# Altium PCB iso_simucam.PcbDoc (part 2 of 4)
Units mil, origin at the board's own origin, x right, y up, seen from the top; angles counter-clockwise.
Board outline 2600 x 5120 mil, 2 copper layers (Top Layer, Bottom Layer); 384 components, 206 nets, 1336 pads, 508 vias.
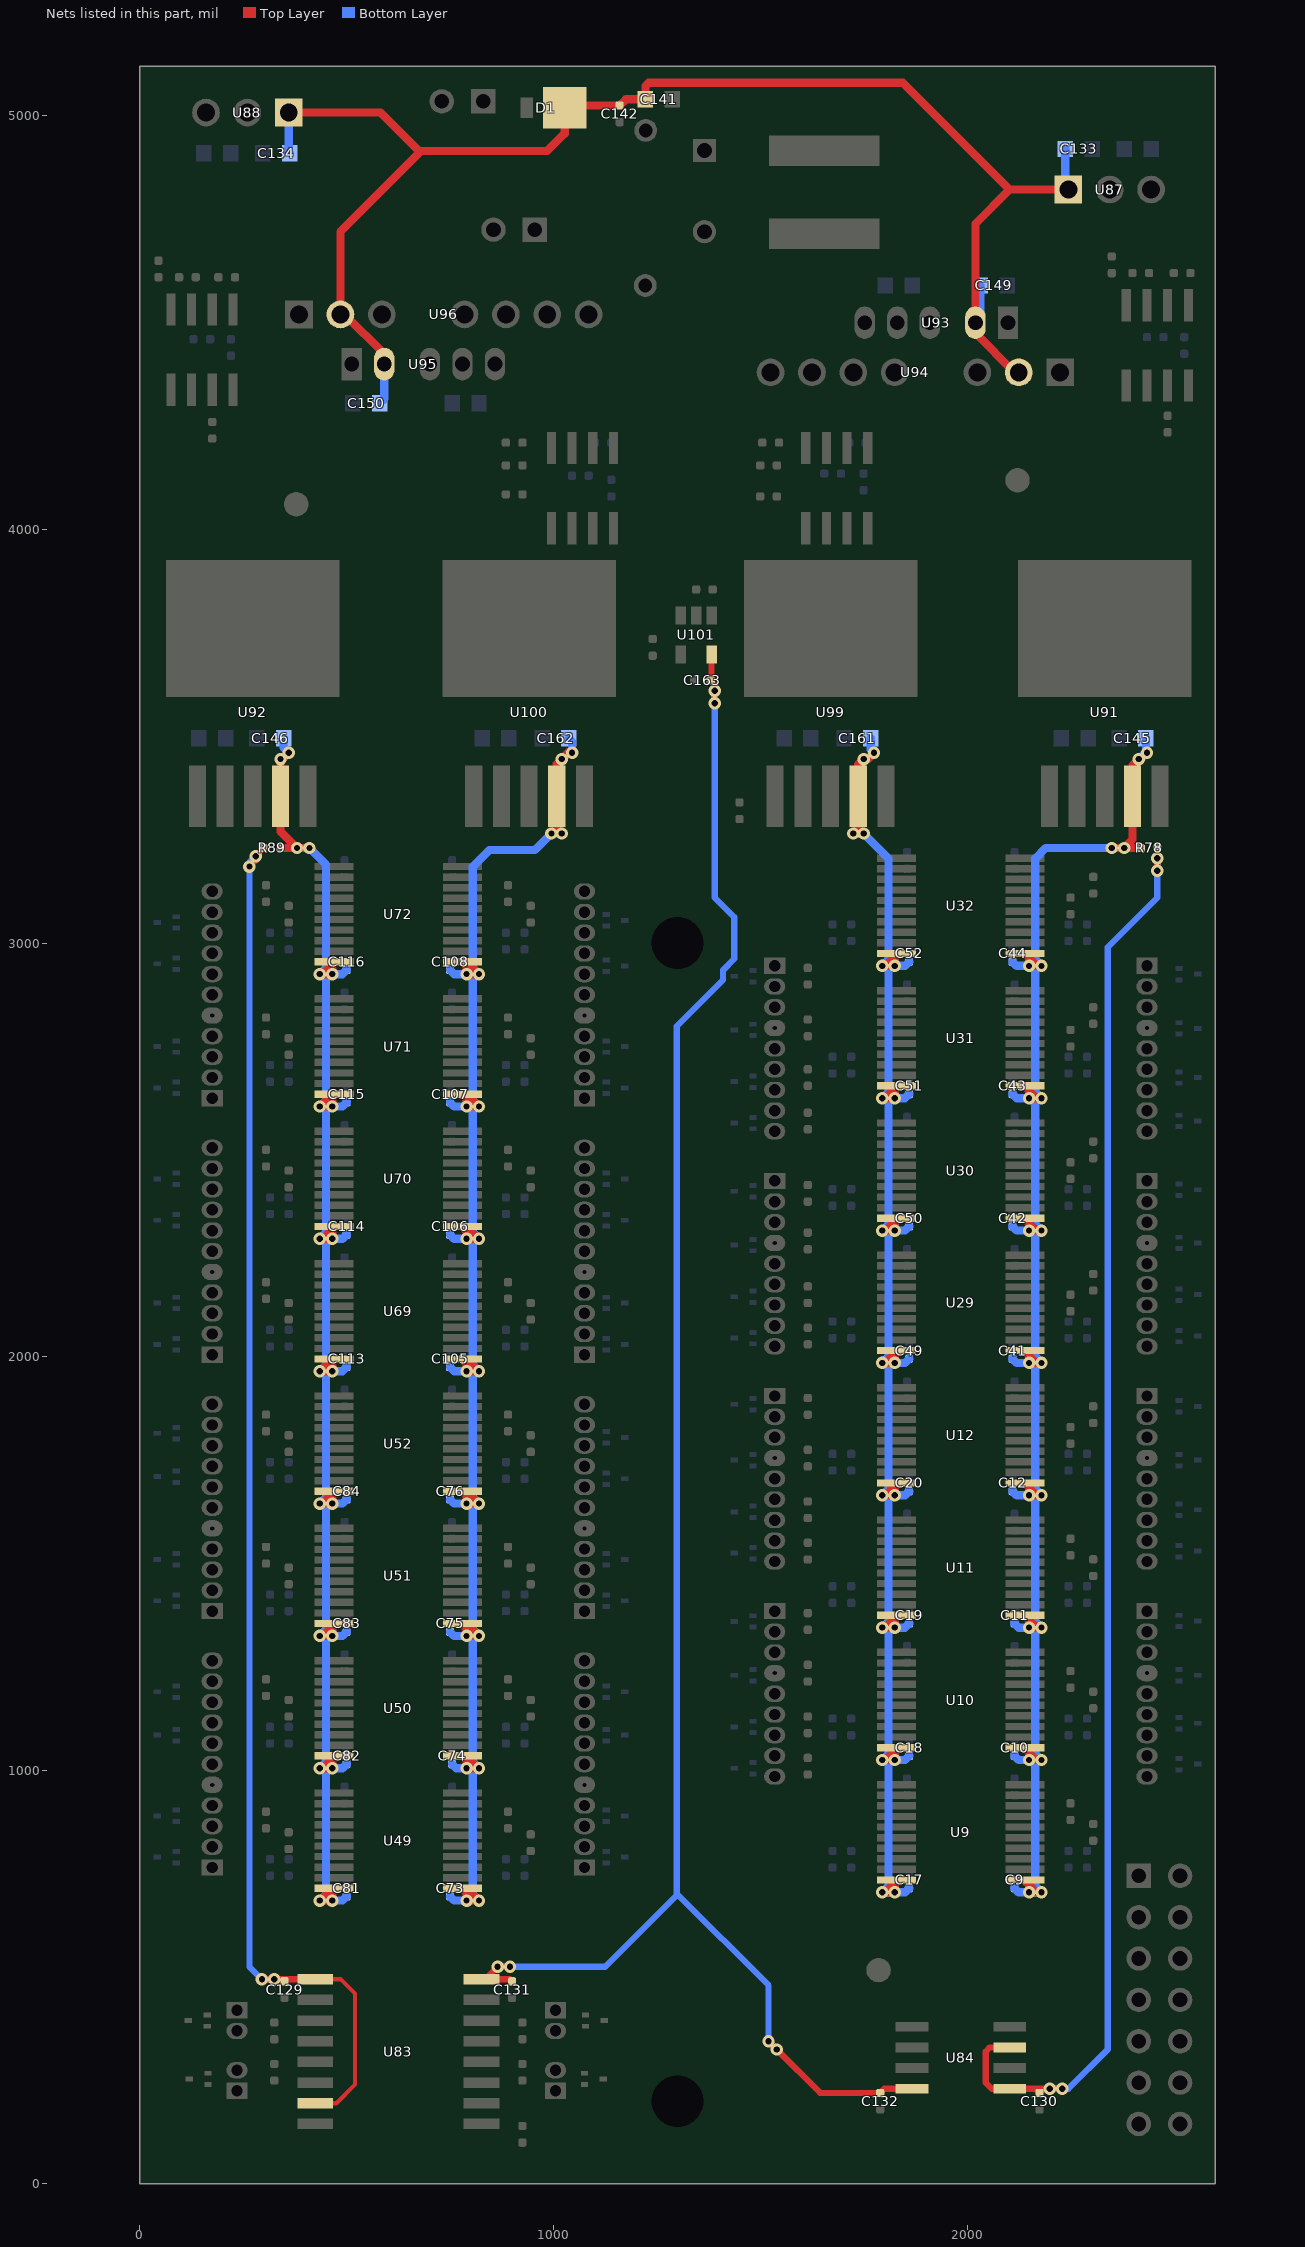
[diagram p2: the nets of this part, all layers, seen from the top]

## Components (designator, comment, footprint, x,y, rotation, side; value= is the part's Value field where it differs from the comment) (continued)
C38 "Capacitor Cerâmico SMD" 0402-cap 2245,2385 r180 bottom
C39 "Capacitor Cerâmico SMD" 0402-cap 2245,2705 r180 bottom
C40 "Capacitor Cerâmico SMD" 0402-cap 2245,3025 r180 bottom
C41 "Capacitor Cerâmico SMD" 0402-cap 2110,2015 r0 bottom
C42 "Capacitor Cerâmico SMD" 0402-cap 2110,2335 r0 bottom
C43 "Capacitor Cerâmico SMD" 0402-cap 2110,2655 r0 bottom
C44 "Capacitor Cerâmico SMD" 0402-cap 2110,2975 r0 bottom
C45 "Capacitor Cerâmico SMD" 0402-cap 2115,2240 r180 bottom
C46 "Capacitor Cerâmico SMD" 0402-cap 2115,2560 r180 bottom
C47 "Capacitor Cerâmico SMD" 0402-cap 2115,2880 r180 bottom
C48 "Capacitor Cerâmico SMD" 0402-cap 2115,3200 r180 bottom
C49 "Capacitor Cerâmico SMD" 0402-cap 1860,2015 r180 bottom
C50 "Capacitor Cerâmico SMD" 0402-cap 1860,2335 r180 bottom
C51 "Capacitor Cerâmico SMD" 0402-cap 1860,2655 r180 bottom
C52 "Capacitor Cerâmico SMD" 0402-cap 1860,2975 r180 bottom
C53 "Capacitor Cerâmico SMD" 0402-cap 1855,2240.08 r180 bottom
C54 "Capacitor Cerâmico SMD" 0402-cap 1855,2560 r180 bottom
C55 "Capacitor Cerâmico SMD" 0402-cap 1855,2880 r180 bottom
C56 "Capacitor Cerâmico SMD" 0402-cap 1855,3200 r180 bottom
C57 "Capacitor Cerâmico SMD" 0402-cap 1720,2065 r180 bottom
C58 "Capacitor Cerâmico SMD" 0402-cap 1720,2385.08 r180 bottom
C59 "Capacitor Cerâmico SMD" 0402-cap 1720,2705 r180 bottom
C60 "Capacitor Cerâmico SMD" 0402-cap 1720,3025 r180 bottom
C61 "Capacitor Cerâmico SMD" 0402-cap 1675,2065 r180 bottom
C62 "Capacitor Cerâmico SMD" 0402-cap 1675,2385.08 r180 bottom
C63 "Capacitor Cerâmico SMD" 0402-cap 1675,2705 r180 bottom
C64 "Capacitor Cerâmico SMD" 0402-cap 1675,3025 r180 bottom
C65 "Capacitor Cerâmico SMD" 0402-cap 930,765 r180 bottom
C66 "Capacitor Cerâmico SMD" 0402-cap 930,1085 r180 bottom
C67 "Capacitor Cerâmico SMD" 0402-cap 930,1405.08 r180 bottom
C68 "Capacitor Cerâmico SMD" 0402-cap 930,1725 r180 bottom
C69 "Capacitor Cerâmico SMD" 0402-cap 885,765 r180 bottom
C70 "Capacitor Cerâmico SMD" 0402-cap 885,1085 r180 bottom
C71 "Capacitor Cerâmico SMD" 0402-cap 885,1405.08 r180 bottom
C72 "Capacitor Cerâmico SMD" 0402-cap 885,1725 r180 bottom
C73 "Capacitor Cerâmico SMD" 0402-cap 750,715.08 r0 bottom
C74 "Capacitor Cerâmico SMD" 0402-cap 755,1035.08 r0 bottom
C75 "Capacitor Cerâmico SMD" 0402-cap 750,1355 r0 bottom
C76 "Capacitor Cerâmico SMD" 0402-cap 750,1675 r0 bottom
C77 "Capacitor Cerâmico SMD" 0402-cap 755,940 r180 bottom
C78 "Capacitor Cerâmico SMD" 0402-cap 755,1260.08 r180 bottom
C79 "Capacitor Cerâmico SMD" 0402-cap 755,1580 r180 bottom
C80 "Capacitor Cerâmico SMD" 0402-cap 755,1900 r180 bottom
C81 "Capacitor Cerâmico SMD" 0402-cap 500,715 r180 bottom
C82 "Capacitor Cerâmico SMD" 0402-cap 500,1035 r180 bottom
C83 "Capacitor Cerâmico SMD" 0402-cap 500,1355 r180 bottom
C84 "Capacitor Cerâmico SMD" 0402-cap 500,1675.08 r180 bottom
C85 "Capacitor Cerâmico SMD" 0402-cap 495,940 r180 bottom
C86 "Capacitor Cerâmico SMD" 0402-cap 495,1260 r180 bottom
C87 "Capacitor Cerâmico SMD" 0402-cap 495,1580.08 r180 bottom
C88 "Capacitor Cerâmico SMD" 0402-cap 495,1900.08 r180 bottom
C89 "Capacitor Cerâmico SMD" 0402-cap 360,765 r180 bottom
C90 "Capacitor Cerâmico SMD" 0402-cap 360,1085 r180 bottom
C91 "Capacitor Cerâmico SMD" 0402-cap 360,1405 r180 bottom
C92 "Capacitor Cerâmico SMD" 0402-cap 360,1725 r180 bottom
C93 "Capacitor Cerâmico SMD" 0402-cap 315,765.08 r180 bottom
C94 "Capacitor Cerâmico SMD" 0402-cap 315,1085 r180 bottom
C95 "Capacitor Cerâmico SMD" 0402-cap 315,1405 r180 bottom
C96 "Capacitor Cerâmico SMD" 0402-cap 315,1725.08 r180 bottom
C97 "Capacitor Cerâmico SMD" 0402-cap 930,2045 r180 bottom
C98 "Capacitor Cerâmico SMD" 0402-cap 930,2365.08 r180 bottom
C99 "Capacitor Cerâmico SMD" 0402-cap 930,2685 r180 bottom
C100 "Capacitor Cerâmico SMD" 0402-cap 930,3005 r180 bottom
C101 "Capacitor Cerâmico SMD" 0402-cap 885,2045 r180 bottom
C102 "Capacitor Cerâmico SMD" 0402-cap 885,2365 r180 bottom
C103 "Capacitor Cerâmico SMD" 0402-cap 885,2685 r180 bottom
C104 "Capacitor Cerâmico SMD" 0402-cap 885,3005 r180 bottom
C105 "Capacitor Cerâmico SMD" 0402-cap 750,1995 r0 bottom
C106 "Capacitor Cerâmico SMD" 0402-cap 750,2315 r0 bottom
C107 "Capacitor Cerâmico SMD" 0402-cap 750,2635.08 r0 bottom
C108 "Capacitor Cerâmico SMD" 0402-cap 750,2955 r0 bottom
C109 "Capacitor Cerâmico SMD" 0402-cap 755,2220 r180 bottom
C110 "Capacitor Cerâmico SMD" 0402-cap 755,2540 r180 bottom
C111 "Capacitor Cerâmico SMD" 0402-cap 755,2860.08 r180 bottom
C112 "Capacitor Cerâmico SMD" 0402-cap 755,3180 r180 bottom
C113 "Capacitor Cerâmico SMD" 0402-cap 500,1995 r180 bottom
C114 "Capacitor Cerâmico SMD" 0402-cap 500,2315 r180 bottom
C115 "Capacitor Cerâmico SMD" 0402-cap 500,2635.08 r180 bottom
C116 "Capacitor Cerâmico SMD" 0402-cap 500,2955 r180 bottom
C117 "Capacitor Cerâmico SMD" 0402-cap 495,2220 r180 bottom
C118 "Capacitor Cerâmico SMD" 0402-cap 495,2540.08 r180 bottom
C119 "Capacitor Cerâmico SMD" 0402-cap 495,2859.92 r180 bottom
C120 "Capacitor Cerâmico SMD" 0402-cap 495,3180 r180 bottom
C121 "Capacitor Cerâmico SMD" 0402-cap 360,2045 r180 bottom
C122 "Capacitor Cerâmico SMD" 0402-cap 360,2365 r180 bottom
C123 "Capacitor Cerâmico SMD" 0402-cap 360,2685 r180 bottom
C124 "Capacitor Cerâmico SMD" 0402-cap 360,3005 r180 bottom
C125 "Capacitor Cerâmico SMD" 0402-cap 315,2045 r180 bottom
C126 "Capacitor Cerâmico SMD" 0402-cap 315,2365.08 r180 bottom
C127 "Capacitor Cerâmico SMD" 0402-cap 315,2685 r180 bottom
C128 "Capacitor Cerâmico SMD" 0402-cap 315,3005 r180 bottom
C129 "Capacitor Cerâmico SMD" 0402-cap 350,470 r180 top
C130 "Capacitor Cerâmico SMD" 0402-cap 2175,200 r0 top
C131 "Capacitor Cerâmico SMD" 0402-cap 900,469.92 r0 top
C132 "Capacitor Cerâmico SMD" 0402-cap 1790,200 r180 top
C133 "Capacitor Cerâmico SMD" "0603 - CAP - montagem na maquina" 2270,4920 r180 bottom
C134 "Capacitor Cerâmico SMD" "0603 - CAP - montagem na maquina" 330,4910 r0 bottom
C135 "Capacitor Cerâmico SMD" "0603 - CAP - montagem na maquina" 2412.48,4920 r0 bottom
C136 "Capacitor Cerâmico SMD" "0603 - CAP - montagem na maquina" 187.48,4910 r180 bottom
C137 "Capacitor Cerâmico SMD" 0402-cap 2520,4620 r270 top
C138 "Capacitor Cerâmico SMD" 0402-cap 210,4610 r270 top
C139 "Capacitor Cerâmico SMD" 0402-cap 2350,4640 r0 top
C140 "Capacitor Cerâmico SMD" 0402-cap 45,4630 r0 top
C141 "Capacitor Cerâmico SMD" "0603 - CAP - montagem na maquina" 1255,5040 r180 top
C142 "Capacitor Cerâmico SMD" 0402-cap 1160,5005 r180 top
C143 "Capacitor Cerâmico SMD" "0603 - CAP - montagem na maquina" 2260,3495 r180 bottom
C144 "Capacitor Cerâmico SMD" "0603 - CAP - montagem na maquina" 175,3495 r180 bottom
C145 "Capacitor Cerâmico SMD" "0603 - CAP - montagem na maquina" 2400,3495 r0 bottom
C146 "Capacitor Cerâmico SMD" "0603 - CAP - montagem na maquina" 315,3495 r0 bottom
C147 "DEBF33D103ZA3B" CAP_10X4 1365,4720 r270 top value=Value
C148 "Capacitor Cerâmico SMD" C2225 1655,4815.39 r270 top
C149 "Capacitor Cerâmico SMD" "0603 - CAP - montagem na maquina" 2065,4590 r180 bottom
C150 "Capacitor Cerâmico SMD" "0603 - CAP - montagem na maquina" 547.52,4305 r0 bottom
C151 "Capacitor Cerâmico SMD" "0603 - CAP - montagem na maquina" 1835,4590 r0 bottom
C152 "Capacitor Cerâmico SMD" "0603 - CAP - montagem na maquina" 787.52,4305 r180 bottom
C153 "Capacitor Cerâmico SMD" 0402-cap 1735,4210 r90 bottom
C154 "Capacitor Cerâmico SMD" 0402-cap 1120,4210 r90 bottom
C155 "Capacitor Cerâmico SMD" 0402-cap 1525.08,4210 r90 top
C156 "Capacitor Cerâmico SMD" 0402-cap 905,4210 r90 top
C157 "Capacitor Cerâmico SMD" "0603 - CAP - montagem na maquina" 1590,3495 r180 bottom
C158 "Capacitor Cerâmico SMD" "0603 - CAP - montagem na maquina" 860,3495 r180 bottom
C159 "Capacitor Cerâmico SMD" 0402-cap 1365,3855 r90 top
C160 "Capacitor Cerâmico SMD" 0402-cap 1240,3715 r0 top
C161 "Capacitor Cerâmico SMD" "0603 - CAP - montagem na maquina" 1735,3495 r0 bottom
C162 "Capacitor Cerâmico SMD" "0603 - CAP - montagem na maquina" 1005,3495 r0 bottom
C163 "Capacitor Cerâmico SMD" 0402-cap 1360.08,3635 r90 top
CN1 "MHDR1X9" MHDR1X9_Axonn 2435,1385 r270 bottom locked
CN2 "MHDR1X9" MHDR1X9_Axonn 2435,1905 r270 bottom locked
CN3 "MHDR1X9" MHDR1X9_Axonn 1535,1385 r270 top locked
CN4 "MHDR1X9" MHDR1X9_Axonn 1535,1905 r270 top locked
CN5 "MHDR1X9" MHDR1X9_Axonn 2435,2425 r270 bottom locked
CN6 "MHDR1X9" MHDR1X9_Axonn 2435,2945 r270 bottom locked
CN7 "MHDR1X9" MHDR1X9_Axonn 1535,2425 r270 top locked
CN8 "MHDR1X9" MHDR1X9_Axonn 1535,2945 r270 top locked
CN9 "MHDR1X11" MHDR1X11_Axonn 1075,765 r90 top locked
CN10 "MHDR1X11" MHDR1X11_Axonn 1075,1385 r90 top locked
CN11 "MHDR1X11" MHDR1X11_Axonn 175,765 r90 bottom locked
CN12 "MHDR1X11" MHDR1X11_Axonn 175,1385 r90 bottom locked
CN13 "MHDR1X11" MHDR1X11_Axonn 1075,2005 r90 top locked
CN14 "MHDR1X11" MHDR1X11_Axonn 1075,2625 r90 top locked
CN15 "MHDR1X11" MHDR1X11_Axonn 175,2005 r90 bottom locked
CN16 "MHDR1X11" MHDR1X11_Axonn 175,2625 r90 bottom locked
CN17 "MHDR1X2" MHDR1X2_AXONN 235,420 r270 top
CN18 "MHDR1X2" MHDR1X2_AXONN 235,225 r90 top
CN19 "Header 7X2" HDR2X7 2415,745 r270 top
CN20 "MHDR1X2" MHDR1X2_AXONN 1005,420 r270 top
CN21 "MHDR1X2" MHDR1X2_AXONN 1005,225 r90 top
CN22 "Header 2" HDR1X2 830,5035 r180 top
CN23 "Header 2" HDR1X2 955,4725 r180 top
D1 "NRVBM130LT3G" D0-216AA 1027.12,5020 r90 top
ESD "##nl" ESTATICA 1466,557 r0 top
ESD1 "##nl" ESTATICA 615,335 r180 bottom
fab1 "Comment" "TEXTO FABRICACAO" 1375,7920 r0 top
FD1 "##nl" FIDUCIAL 378,4061 r0 top
FD2 "##nl" FIDUCIAL 2122,4119 r0 top
FD3 "##nl" FIDUCIAL 1786,517 r0 top
R1 "Res3" 0402-res 2305,850 r0 top
R2 "Res3" 0402-res 2250,900 r0 top
R3 "Res3" 0402-res 2305,1170 r0 top
R4 "Res3" 0402-res 2250,1220 r0 top
R5 "Res3" 0402-res 2305,1490 r0 top
R6 "Res3" 0402-res 2250,1540 r0 top
R7 "Res3" 0402-res 2250,1810 r0 top
R8 "Res3" 0402-res 2305,1860 r0 top
R9 "Res3" 0402-res 1615,1010 r0 top
R10 "Res3" 0402-res 1615,1110 r0 top
R11 "Res3" 0402-res 1615,1235 r0 top
R12 "Res3" 0402-res 1615,1360 r0 top
R13 "Res3" 0402-res 1615,1530 r0 top
R14 "Res3" 0402-res 1615,1630 r0 top
R15 "Res3" 0402-res 1615,1755 r0 top
R16 "Res3" 0402-res 1615,1880 r0 top
R17 "Res3" 0402-res 2250,2130 r0 top
R18 "Res3" 0402-res 2305,2180 r0 top
R19 "Res3" 0402-res 2250,2450 r0 top
R20 "Res3" 0402-res 2305,2500 r0 top
R21 "Res3" 0402-res 2250,2770 r0 top
R22 "Res3" 0402-res 2305,2825 r0 top
R23 "Res3" 0402-res 2250,3090 r0 top
R24 "Res3" 0402-res 2305,3140 r0 top
R25 "Res3" 0402-res 1615,2050 r0 top
R26 "Res3" 0402-res 1615,2150 r0 top
R27 "Res3" 0402-res 1615,2280 r0 top
R28 "Res3" 0402-res 1615,2395 r0 top
R29 "Res3" 0402-res 1615,2570 r0 top
R30 "Res3" 0402-res 1615,2675 r0 top
R31 "Res3" 0402-res 1615,2795 r0 top
R32 "Res3" 0402-res 1615,2920.08 r0 top
R33 "Res3" 0402-res 945,825 r0 top
R34 "Res3" 0402-res 890,880 r0 top
R35 "Res3" 0402-res 945,1150.08 r0 top
R36 "Res3" 0402-res 890,1200 r0 top
R37 "Res3" 0402-res 945,1470 r0 top
R38 "Res3" 0402-res 890,1520 r0 top
R39 "Res3" 0402-res 945,1790 r0 top
R40 "Res3" 0402-res 890,1840 r0 top
R41 "Res3" 0402-res 360,830 r0 top
R42 "Res3" 0402-res 305,880 r0 top
R43 "Res3" 0402-res 360,1150 r0 top
R44 "Res3" 0402-res 305,1200 r0 top
R45 "Res3" 0402-res 360,1470 r0 top
R46 "Res3" 0402-res 305,1520 r0 top
R47 "Res3" 0402-res 360,1790 r0 top
R48 "Res3" 0402-res 305,1840 r0 top
R49 "Res3" 0402-res 945,2110 r0 top
R50 "Res3" 0402-res 890,2160 r0 top
R51 "Res3" 0402-res 945,2430 r0 top
R52 "Res3" 0402-res 890,2480 r0 top
R53 "Res3" 0402-res 945,2750 r0 top
R54 "Res3" 0402-res 890,2800 r0 top
R55 "Res3" 0402-res 945,3070 r0 top
R56 "Res3" 0402-res 890,3120 r0 top
R57 "Res3" 0402-res 360,2110 r0 top
R58 "Res3" 0402-res 305,2160 r0 top
R59 "Res3" 0402-res 360,2430 r0 top
R60 "Res3" 0402-res 305,2480 r0 top
R61 "Res3" 0402-res 360,2750 r0 top
R62 "Res3" 0402-res 305,2800 r0 top
R63 "Res3" 0402-res 360,3070 r0 top
R64 "Res3" 0402-res 305,3120 r0 top
R65 "Res3" 0402-res 325,370 r180 top
R66 "Res3" 0402-res 325,270.08 r180 top
R67 "Res3" 0402-res 925,120 r180 top
R68 "Res3" 0402-res 925,370.08 r180 top
R69 "Res3" 0402-res 925,270 r180 top
R70 "Res3" 0402-res 2420,4620 r270 top
R71 "Res3" 0402-res 115,4610 r270 top
R72 "Res3" 0402-res 2455,4465 r90 bottom
R73 "Res3" 0402-res 149.92,4460 r90 bottom
R74 "Res3" 0402-res 2525,4445 r180 bottom
R75 "Res3" 0402-res 220,4440.08 r180 bottom
R76 "Res3" 0402-res 2485,4255 r180 top
R77 "Res3" 0402-res 175,4240 r180 top
R78 "Res3" 0402-res 2440.08,3230 r90 top
R79 "Res3" CR25 1225,4740 r0 top
R80 "Res3" 0402-res 1520.08,4155 r270 top
R81 "Res3" 0402-res 905,4155 r270 top
R82 "Res3" 0402-res 1675,4135 r90 bottom
R83 "Res3" 0402-res 1065,4130 r90 bottom
R84 "Res3" 0402-res 1750,4115 r180 bottom
R85 "Res3" 0402-res 1140,4100 r180 bottom
R86 "Res3" 0402-res 1520,4080 r90 top
R87 "Res3" 0402-res 905,4085 r90 top
R88 "Res3" 0402-res 1450,3320 r180 top
R89 "Res3" 0402-res 320,3230 r270 top
U1 "TPD2E009DRTR" DRT3 2535,1015 r90 bottom
U2 "TPD2E009DRTR" DRT3 2535,1113.78 r90 bottom
U3 "TPD2E009DRTR" DRT3 2535,1230 r90 bottom
U4 "TPD2E009DRTR" DRT3 2535,1361.22 r90 bottom
U5 "TPD2E009DRTR" DRT3 2535,1530 r90 bottom
U6 "TPD2E009DRTR" DRT3 2535,1630 r90 bottom
U7 "TPD2E009DRTR" DRT3 2535,1750 r90 bottom
U8 "TPD2E009DRTR" DRT3 2535,1880 r90 bottom
U9 "ADN4650BRSZ" SSOP-RS-20 1985,850 r180 top locked
U10 "ADN4650BRSZ" SSOP-RS-20 1985,1170 r180 top locked
U11 "ADN4650BRSZ" SSOP-RS-20 1985,1490 r180 top locked
U12 "ADN4650BRSZ" SSOP-RS-20 1985,1810 r180 top locked
U13 "TPD2E009DRTR" DRT3 1460,1005 r270 bottom
U14 "TPD2E009DRTR" DRT3 1460,1105 r270 bottom
U15 "TPD2E009DRTR" DRT3 1460,1230 r270 bottom
U16 "TPD2E009DRTR" DRT3 1460,1360 r270 bottom
U17 "TPD2E009DRTR" DRT3 1460,1525 r270 bottom
U18 "TPD2E009DRTR" DRT3 1460,1625 r270 bottom
U19 "TPD2E009DRTR" DRT3 1460,1750 r270 bottom
U20 "TPD2E009DRTR" DRT3 1460,1885 r270 bottom
U21 "TPD2E009DRTR" DRT3 2535,2050 r90 bottom
U22 "TPD2E009DRTR" DRT3 2535,2150 r90 bottom
U23 "TPD2E009DRTR" DRT3 2535,2275 r90 bottom
U24 "TPD2E009DRTR" DRT3 2535,2403.78 r90 bottom
U25 "TPD2E009DRTR" DRT3 2535,2570 r90 bottom
U26 "TPD2E009DRTR" DRT3 2535,2675 r90 bottom
U27 "TPD2E009DRTR" DRT3 2535,2793.78 r90 bottom
U28 "TPD2E009DRTR" DRT3 2535,2925 r90 bottom
U29 "ADN4650BRSZ" SSOP-RS-20 1985,2130 r180 top locked
U30 "ADN4650BRSZ" SSOP-RS-20 1985,2450 r180 top locked
U31 "ADN4650BRSZ" SSOP-RS-20 1985,2770 r180 top locked
U32 "ADN4650BRSZ" SSOP-RS-20 1985,3090.16 r180 top locked
U33 "TPD2E009DRTR" DRT3 1460,2045 r270 bottom
U34 "TPD2E009DRTR" DRT3 1460,2145 r270 bottom
U35 "TPD2E009DRTR" DRT3 1460,2270 r270 bottom
U36 "TPD2E009DRTR" DRT3 1460,2400 r270 bottom
U37 "TPD2E009DRTR" DRT3 1460,2565 r270 bottom
U38 "TPD2E009DRTR" DRT3 1460,2665 r270 bottom
U39 "TPD2E009DRTR" DRT3 1460,2790 r270 bottom
U40 "TPD2E009DRTR" DRT3 1460,2920 r270 bottom
U41 "TPD2E009DRTR" DRT3 1150,790 r90 bottom
U42 "TPD2E009DRTR" DRT3 1150,890 r90 bottom
U43 "TPD2E009DRTR" DRT3 1150,1085 r90 bottom
U44 "TPD2E009DRTR" DRT3 1150,1190 r90 bottom
U45 "TPD2E009DRTR" DRT3 1150,1410 r90 bottom
U46 "TPD2E009DRTR" DRT3 1150,1510 r90 bottom
U47 "TPD2E009DRTR" DRT3 1150,1705 r90 bottom
U48 "TPD2E009DRTR" DRT3 1150,1805 r90 bottom
U49 "ADN4650BRSZ" SSOP-RS-20 625,830 r180 top locked
U50 "ADN4650BRSZ" SSOP-RS-20 625,1150 r180 top locked
U51 "ADN4650BRSZ" SSOP-RS-20 625,1470 r180 top locked
U52 "ADN4650BRSZ" SSOP-RS-20 625,1790 r180 top locked
U53 "TPD2E009DRTR" DRT3 65,790 r270 bottom
U54 "TPD2E009DRTR" DRT3 65,890 r270 bottom
U55 "TPD2E009DRTR" DRT3 65,1085 r270 bottom
U56 "TPD2E009DRTR" DRT3 65,1190 r270 bottom
U57 "TPD2E009DRTR" DRT3 65,1410 r270 bottom
U58 "TPD2E009DRTR" DRT3 65,1510 r270 bottom
U59 "TPD2E009DRTR" DRT3 65,1710 r270 bottom
U60 "TPD2E009DRTR" DRT3 65,1815 r270 bottom
U61 "TPD2E009DRTR" DRT3 1150,2030 r90 bottom
U62 "TPD2E009DRTR" DRT3 1150,2130 r90 bottom
U63 "TPD2E009DRTR" DRT3 1150,2330 r90 bottom
U64 "TPD2E009DRTR" DRT3 1150,2430 r90 bottom
U65 "TPD2E009DRTR" DRT3 1150,2650 r90 bottom
U66 "TPD2E009DRTR" DRT3 1150,2750 r90 bottom
U67 "TPD2E009DRTR" DRT3 1150,2945 r90 bottom
U68 "TPD2E009DRTR" DRT3 1150,3055 r90 bottom
U69 "ADN4650BRSZ" SSOP-RS-20 625,2109.57 r180 top locked
U70 "ADN4650BRSZ" SSOP-RS-20 625,2430 r180 top locked
U71 "ADN4650BRSZ" SSOP-RS-20 625,2750 r180 top locked
U72 "ADN4650BRSZ" SSOP-RS-20 625,3070 r180 top locked
U73 "TPD2E009DRTR" DRT3 65,2030 r270 bottom
U74 "TPD2E009DRTR" DRT3 65,2130 r270 bottom
U75 "TPD2E009DRTR" DRT3 65,2330 r270 bottom
U76 "TPD2E009DRTR" DRT3 65,2430 r270 bottom
U77 "TPD2E009DRTR" DRT3 65,2650 r270 bottom
U78 "TPD2E009DRTR" DRT3 65,2750 r270 bottom
U79 "TPD2E009DRTR" DRT3 65,2950 r270 bottom
U80 "TPD2E009DRTR" DRT3 65,3050 r270 bottom
U81 "TPD2E009DRTR" DRT3 140,395 r90 top
U82 "TPD2E009DRTR" DRT3 142.36,253.78 r90 top
U83 "ISO7821LL-DW" SOIC-16-DW 625,320 r270 top
U84 "ISO7710FD" SOIC-8 1985,305 r180 top
U85 "TPD2E009DRTR" DRT3 1100,395 r270 top
U86 "TPD2E009DRTR" DRT3 1097.64,253.78 r270 top
U87 "R-78E5.0-1.0" TO-220 2345,4822 r0 top
U88 "R-78E5.0-1.0" TO-220 260,5008 r180 top
U89 "TPS25921ADR" D8 2460,4445 r270 top value=Value
U90 "TPS25921ADR" D8 150,4435 r270 top value=Value
U91 "MCP1826-3302E/ET" DDPAK-ET5_N 2333,3603 r90 top
U92 "MCP1826-3302E/ET" DDPAK-ET5_N 273,3603 r90 top
U93 "TRN3-1211" TRN3 2098.98,4500 r180 top
U94 "RS6-1205S" RS6 2225,4380 r180 top
U95 "TRN3-1211" TRN3 512.28,4400 r0 top
U96 "RS6-1205S" RS6 385,4520 r0 top
U97 "TPS25921ADR" D8 1685,4100 r270 top value=Value
U98 "TPS25921ADR" D8 1070,4100 r270 top value=Value
U99 "MCP1826-3302E/ET" DDPAK-ET5_N 1670,3603 r90 top
U100 "MCP1826-3302E/ET" DDPAK-ET5_N 941.14,3603 r90 top
U101 "TC1014-3.3VCT713" SOT-23-CT5_N 1345,3745 r270 top

## Footprints (in the part's own frame and the unit in brackets; to place one, negate y for a bottom-side part, rotate by r counter-clockwise, add the part's x,y. Pads: shape width x height; smd on the part's side, far side on the other; paste and mask are expansions set on the pad)
0402-cap [mm]
  rrect50% 0.5x0.51 smd: 1(0,0.51) 2(0,-0.51)
  silkscreen extent -0.5,-1.02 0.5,1.02
0402-res [mm]
  rrect50% 0.5x0.51 smd: 1(0,0.51) 2(0,-0.51)
  silkscreen extent -0.5,-1 0.5,1
"0603 - CAP - montagem na maquina" [mm] "Chip Capacitor, 2-Leads, Body 1,6x0,8mm, IPC Medium Density"
  rect 0.95x1 smd: 1(-0.825,0) 2(0.825,0)
  silkscreen extent -1.62,-0.85 1.62,0.85, body extent -0.89,-0.48 0.89,0.48, height 0.6
C2225 [mm] "Chip Capacitor; Body 5.6 x 6.4 mm (LxW typ)"
  rect 1.9x6.8 smd: 1(-2.55,0) 2(2.55,0)
  silkscreen extent -1.3,-3.3 1.3,3.3
CAP_10X4 [mil]
  rect 56x56 / inner round 60 / far side rect 56x56 hole 36: 1(-196,0)
  round 56 / inner round 60 / far side round 56 hole 36: 2(0,0)
  silkscreen extent -332,-84 104,84, body extent 0,0 10,10, height 10
CR25 [mm] "RESISTOR CR-25"
  round 1.4 hole 0.85: 1(-0.076,-3.81) 2(-0.051,5.715)
  silkscreen extent -1.27,-2.77 1.09,4.67, body extent -1.3,-4.06 1.12,5.96, height 2.2
D0-216AA [mil]
  rect 100x105.12 smd: 1(0,0)
  rect 50x30 smd: 2(0,92.12)
  silkscreen extent -65,-88 65,122
D8 [mil]
  rect 78x22 smd paste+0 mask+0: 1(-97,75) 2(-97,25) 3(-97,-25) 4(-97,-75) 5(97,-75) 6(97,-25) 7(97,25) 8(97,75)
  silkscreen extent -125,-104 84,110, body extent 0,0 10,10, height 10
DDPAK-ET5_N [mm] "D2-PAK, 6-Leads, Body 9x10.2mm, Pitch 1.7mm, Lead Span 14.9mm, IPC Medium Density"
  rect 3.8x1.05 smd: 1(-6.3,3.4) 2(-6.3,1.7) 3(-6.3,0) 4(-6.3,-1.7) 5(-6.3,-3.4)
  rect 8.4x10.65 smd: 6(4,0)
  silkscreen extent -6.42,-5.35 -0.6,5.35, body extent -3.3,-5.32 6.35,5.33, height 4.83
DRT3 [mm] "SOTFL, 3-Leads, Body 1x1mm (inc leads), Pitch 0.35mm"
  rect 0.3x0.45 smd: 1(-0.35,-0.575) 2(0.35,-0.575) 3(0,0.575)
  silkscreen extent -0.85,-0.62 0.67,0.58, body extent -0.52,-0.42 0.52,0.42, height 0.5
ESTATICA [mil]
  silkscreen extent -277,-159 257,301
FIDUCIAL [mm]
  round 1.5 all layers, no hole paste+0 mask+0.381: 0(0,0)
  Top Layer pour cut-out: -0.686,1.041 -0.457,1.168 -0.279,1.219 -0.102,1.245 0.102,1.245 0.33,1.194 0.584,1.118 0.711,1.016 0.889,0.889 1.016,0.737 1.143,0.559 1.219,0.305 1.245,0.127 1.245,-0.152 1.219,-0.305 1.118,-0.584 0.889,-0.914 0.737,-1.016 0.559,-1.118 0.305,-1.219 0.102,-1.245 -0.178,-1.245 -0.432,-1.219 -0.737,-0.991 -0.889,-0.838 -1.143,-0.533 -1.194,-0.381 -1.27,-0.229 -1.27,0.025 -1.245,0.178 -1.168,0.457 -1.016,0.686 -0.914,0.864
  Bottom Layer pour cut-out: -0.686,1.041 -0.457,1.168 -0.279,1.219 -0.102,1.245 0.102,1.245 0.33,1.194 0.584,1.118 0.711,1.016 0.889,0.889 1.016,0.737 1.143,0.559 1.219,0.305 1.245,0.127 1.245,-0.152 1.219,-0.305 1.118,-0.584 0.889,-0.914 0.737,-1.016 0.559,-1.118 0.305,-1.219 0.102,-1.245 -0.178,-1.245 -0.432,-1.219 -0.737,-0.991 -0.889,-0.838 -1.143,-0.533 -1.194,-0.381 -1.27,-0.229 -1.27,0.025 -1.245,0.178 -1.168,0.457 -1.016,0.686 -0.914,0.864
  silkscreen extent -1.25,-1.25 1.25,1.25
HDR1X2 [mm] "Connector; Header; 2 Position"
  rect 1.5x1.5 hole 0.9: 1(0,0)
  round 1.5 hole 0.9: 2(2.54,0)
  silkscreen extent -1.27,-1.27 3.81,1.27
HDR2X7 [mm] "Connector; Header; 7x2 Position"
  rect 1.5x1.5 hole 0.9: 1(0,0)
  round 1.5 hole 0.9: 2(0,2.54) 3(2.54,0) 4(2.54,2.54) 5(5.08,0) 6(5.08,2.54) 7(7.62,0) 8(7.62,2.54) 9(10.16,0) 10(10.16,2.54) 11(12.7,0) 12(12.7,2.54) 13(15.24,0) 14(15.24,2.54)
  silkscreen extent -1.27,-1.27 16.51,3.81
LEIA_DOCUMENTACAO [mil]
  silkscreen extent -244,-162 242,296
MHDR1X2_AXONN [mm] "Connector; Header; 2 Position"
  rect 1x1.3 hole 0.7: 1(0,0)
  oval 1x1.3 hole 0.7: 2(1.27,0)
  silkscreen extent -0.9,-0.9 2.17,0.9
MHDR1X9_Axonn [mm] "Connector; Header; 9 Position"
  rect 1x1.3 hole 0.7: 1(0,0)
  oval 1x1.3 hole 0.7: 2(1.27,0) 3(2.54,0) 5(5.08,0) 6(6.35,0) 7(7.62,0) 8(8.89,0) 9(10.16,0)
  oval 1x1.3 hole 0.25: 4(3.81,0)
  silkscreen extent -0.9,-0.9 11.06,0.9
MHDR1X11_Axonn [mm] "Connector; Header; 11 Position"
  rect 1x1.3 hole 0.7: 1(0,0)
  oval 1x1.3 hole 0.7: 2(1.27,0) 3(2.54,0) 4(3.81,0) 6(6.35,0) 7(7.62,0) 8(8.89,0) 9(10.16,0) 10(11.43,0) 11(12.7,0)
  oval 1x1.3 hole 0.25: 5(5.08,0)
  silkscreen extent -0.9,-0.9 13.6,0.9
RS6 [mm] "8-pin, pth, sip, 2.54 mm pitch"
  rect 1.7x1.7 hole 1.1: 1(0,0)
  round 1.7 hole 1.1: 2(2.54,0) 3(5.08,0) 5(10.16,0) 6(12.7,0) 7(15.24,0) 8(17.78,0)
  silkscreen extent -2.31,-6 19.78,4.83
SOIC-8 [mm] "SOIC, 8-Leads, Body 4.9x3.9mm, Pitch 1.27mm, IPC Low Density"
  rect 2x0.6 smd: 1(-3,1.905) 2(-3,0.635) 3(-3,-0.635) 4(-3,-1.905) 5(3,-1.905) 6(3,-0.635) 7(3,0.635) 8(3,1.905)
  silkscreen extent -2.83,-2.5 1.55,2.88, body extent -2,-2.5 2,2.5, height 1.83
SOIC-16-DW [mm] "DFP; 16 Leads; Body 10.5 x 7.6 mm (LxW max); Pitch 1.27 mm"
  rect 0.65x2.2 smd: 1(-4.445,-5.1) 2(-3.175,-5.1) 3(-1.905,-5.1) 4(-0.635,-5.1) 5(0.635,-5.1) 6(1.905,-5.1) 7(3.175,-5.1) 8(4.445,-5.1) 9(4.445,5.1) 10(3.175,5.1) 11(1.905,5.1) 12(0.635,5.1) 13(-0.635,5.1) 14(-1.905,5.1) 15(-3.175,5.1) 16(-4.445,5.1)
  silkscreen extent -5.48,-4.92 5.49,3.6
SOT-23-CT5_N [mm] "SOT23, 5-Leads, Body 2.9x1.6mm, Pitch 0.95mm, Lead Span 2.7mm, IPC Medium Density"
  rect 1.1x0.65 smd: 1(-1.2,0.95) 2(-1.2,0) 3(-1.2,-0.95) 4(1.2,-0.95) 5(1.2,0.95)
  silkscreen extent -1.32,-1.55 0.25,1.95, body extent -0.9,-1.55 0.9,1.55, height 1.45
SSOP-RS-20 [mm]
  rect 2.4x0.45 smd: 1(-3.95,2.925) 2(-3.95,2.275) 3(-3.95,1.625) 4(-3.95,0.975) 5(-3.95,0.325) 6(-3.95,-0.325) 7(-3.95,-0.975) 8(-3.95,-1.625) 9(-3.95,-2.275) 10(-3.95,-2.925) 11(3.95,-2.925) 12(3.95,-2.275) 13(3.95,-1.625) 14(3.95,-0.975) 15(3.95,-0.325) 16(3.95,0.325) 17(3.95,0.975) 18(3.95,1.625) 19(3.95,2.275) 20(3.95,2.925)
  silkscreen extent -3.63,-3.8 2.4,3.9, body extent -2.8,-3.8 2.8,3.9, height 2
"TEXTO FABRICACAO" [mil]
TO-220 [mm] "TO, Thru-Hole, Vertical, Heatsink Mounted; 3 In-Line Leads; Pitch 2.54 mm"
  rect 1.7x1.7 hole 1.1: 1(-2.54,0)
  round 1.7 hole 1.1: 2(0,0) 3(2.54,0)
  silkscreen extent -7.24,-2 5.85,6.85
TRN3 [mm] "Thru-Hole, Vertical, 5 In-Line Leads; Pitch 2.00 mm"
  rect 1.25x2 hole 0.9: 1(0,0)
  oval 1.25x2 hole 0.9: 2(2,0) 3(4.8,0) 4(6.8,0) 5(8.8,0)
  silkscreen extent -2.92,-3.7 10.4,4

## Part data
AT1: library part ATENCAO, "ATENCAO", Valor=Attention
C147 U89 U90 U97 U98: "Imported", Built_By=EMA_UL_Team
  C147: C="Copyright (C) 2015 Accelerated Designs. All rights reserved", Manufacturer_Part_Number=DEBF33D103ZA3B, Valor="10n @ 2KV", Vendor=Murata
  U89 U90 U97 U98: C="Copyright (C) 2016 Accelerated Designs. All rights reserved", Manufacturer_Part_Number=TPS25921ADR, RefDes=RefDes, Type=Type, Vendor="Texas Instruments"
C148: Part Number=C2225X104KFRACTU, Valor="100n @ 2KV"
CN1 CN2 CN3 CN4 CN5 CN6 CN7 CN8: "Header, 9-Pin", LatestRevisionDate=17-Jul-2002, LatestRevisionNote="Re-released for DXP Platform.", Publisher="Altium Limited"
CN9 CN10 CN11 CN12 CN13 CN14 CN15 CN16: "Header, 11-Pin", LatestRevisionDate=17-Jul-2002, LatestRevisionNote="Re-released for DXP Platform.", Publisher="Altium Limited"
CN17 CN18 CN20 CN21 CN22 CN23: "Header, 2-Pin", LatestRevisionDate=17-Jul-2002, LatestRevisionNote="Re-released for DXP Platform.", Publisher="Altium Limited"
  CN17 CN18 CN20 CN21: Valor="Header 1.27 mm - 2 vias"
  CN22 CN23: Valor="Header 2.54 mm"
CN19: "Header, 7-Pin, Dual row", LatestRevisionDate=17-Jul-2002, LatestRevisionNote="Re-released for DXP Platform.", Publisher="Altium Limited"
D1: "Surface Mount  Schottky Power Rectifier - 1.0 AMPERES, 30 VOLTS", Encapsulamento=D0-216AA, Fabricante="On Semi"
ESD ESD1: library part ESD, "ESD"
  ESD1: Valor="ESD logo"
fab1: library part "Texto de fabricação"
FD1 FD2 FD3: library part Fiducial, "Fiducial"
R1 R2 R3 R4 R5 R6 R7 R8 R9 R10 R11 R12 R13 R14 R15 R16 R17 R18 R19 R20 R21 R22 R23 R24 R25 R26 R27 R28 R29 R30 R31 R32 R33 R34 R35 R36 R37 R38 R39 R40 R41 R42 R43 R44 R45 R46 R47 R48 R49 R50 R51 R52 R53 R54 R55 R56 R57 R58 R59 R60 R61 R62 R63 R64 R65 R66 R67 R68 R69 R70 R71 R72 R73 R74 R75 R76 R77 R78 R80 R81 R82 R83 R84 R85 R86 R87 R88 R89: "Resistor", Grupo=01
  R1 R2 R3 R4 R5 R6 R7 R8 R9 R10 R11 R12 R13 R14 R15 R16 R17 R18 R19 R20 R21 R22 R23 R24 R25 R26 R27 R28 R29 R30 R31 R32 R33 R34 R35 R36 R37 R38 R39 R40 R41 R42 R43 R44 R45 R46 R47 R48 R49 R50 R51 R52 R53 R54 R55 R56 R57 R58 R59 R60 R61 R62 R63 R64 R65 R66 R68 R69: Valor=100R
  R67 R88: Valor=10k
  R70 R71 R78 R80 R81 R89: Valor=0R
  R72 R73 R82 R83: Valor="154k - 1%"
  R74 R75 R84 R85: Valor="47k - 1 %"
  R76 R77 R86 R87: Valor=82k
R79: "Resistor", Part Number=VR25000001004FA100, Grupo=01, Valor="1M - PTH - 1/4W - 1,6 kV"
U1 U2 U3 U4 U5 U6 U7 U8 U13 U14 U15 U16 U17 U18 U19 U20 U21 U22 U23 U24 U25 U26 U27 U28 U33 U34 U35 U36 U37 U38 U39 U40 U41 U42 U43 U44 U45 U46 U47 U48 U53 U54 U55 U56 U57 U58 U59 U60 U61 U62 U63 U64 U65 U66 U67 U68 U73 U74 U75 U76 U77 U78 U79 U80 U81 U82 U85 U86: "ESD Protection Array for High-Speed Data Interfaces, 2 Channels, -40 to +85 degC, 3-pin SOT (DRT), Green (RoHS & no Sb/Br)", Breakdown Voltage(Min)(V)=9, Differential Capacitance(pF)=0.01, IO Capacitance(Typ)(pF)=0.7, IO Leakage Current(nA)=10, Manufacturer="Texas Instruments", Supplier Part Number 1=296-25410-2-ND, ComponentLink1Description=Datasheet, ComponentLink1URL=http://www.ti.com/general/docs/lit/getliterature.tsp?genericPartNumber=TPD2E009&fileType=pdf, ComponentLink2Description="URL Link1", ComponentLink2URL=SamplesURL:http://www.ti.com/product/tpd2e009#samples, DatasheetVersion=SLVS953A, Eco-Plan="Green (RoHS & no Sb/Br)", IEC 61000-4-2 Air-Gap(+/- kV)=8, IEC 61000-4-2 Contact(+/- kV)=8, Mounting Technology="Surface Mount", PackageDescription="3-Flat Lead Plastic Small Outline, 1 x 1 mm (inc leads), 0.35 mm Pitch", PackageReference=DRT3, PackageVersion="revD, Jun-2008", PartNumber=TPD2E009DRTR, Serial ATA / eSATA=TRUE, SubFamily="ESD Solution", Supplier 1=Digi-Key, Supplier 2=Digi-Key, Supplier 3=Digi-Key, Supplier 4=Newark, Supplier 5=Mouser, Supplier Part Number 2=296-25410-1-ND, Supplier Part Number 3=296-25410-6-ND, Supplier Part Number 4=50R8093, Supplier Part Number 5=595-TPD2E009DRTR
U9 U10 U11 U12 U29 U30 U31 U32 U49 U50 U51 U52 U69 U70 U71 U72: "5 kV RMS/3.75 kV RMS, 600 Mbps,  Dual-Channel LVDS Isolators", Encapsulamento=SSOP-20, Fabricante="Analog Devices", Grupo=07, Part Number=ADN4650BRSZ
U83: "High-Performance, 8000-VPK Reinforced Isolated Dual-LVDS Buffer", ComponentLink1Description="Manufacturer Link", ComponentLink1URL=http://www.ti.com/, ComponentLink2Description=Datasheet, Publisher="Altium Limited"
U84: "High Speed, Robust EMC Reinforced Single-Channel Digital Isolator", Code_JEDEC=MO-092-AA, ComponentAvailability=Obsolete, ComponentLink1Description="Manufacturer Link", ComponentLink1URL=http://www.ti.com/, ComponentLink2Description=Datasheet, LatestRevisionNote="Stylized 3D Model Added.", PackageDescription="DFP; 8 Leads; Body 4.9 x 3.9 mm (LxW max); Pitch 1.27 mm", PackageReference=SOIC-8, Publisher="Altium Limited"
U87 U88: "3-Terminal Positive dc-dc regulator - 5V @ 1A", Encapsulamento=TO-220, Valor="5V ; 1A"
U91 U92 U99 U100: "1000 mA, Low Voltage, Low Quiescent Current LDO Regulator, 5-Pin DDPAK, Extended Temperature", Manufacturer=Microchip, Supplier Part Number 1=MCP1826-3302E/ET-ND, ComponentLink1Description="Manufacturer URL", ComponentLink1URL=http://www.microchip.com/, ComponentLink2Description=Datasheet, ComponentLink2URL=http://ww1.microchip.com/downloads/en/DeviceDoc/22057a.pdf, ComponentLink3Description="Package Specification", ComponentLink3URL=http://www.microchip.com/stellent/groups/techpub_sg/documents/packagingspec/en012702.pdf, DatasheetVersion="revA, Aug-2007", Mounting Technology="Surface Mount", PackageDescription="5-Lead Plastic (ET) [DDPAK]", PackageReference=DDPAK-ET5, PackageVersion="revBB, Aug-2009", PartNumber=MCP1826-3302E/ET, Supplier 1=Digi-Key, Supplier 2=Newark, Supplier 3=Mouser, Supplier Part Number 2=27M0017, Supplier Part Number 3=579-MCP1826-3302E/ET
U93 U95: "4-Terminal Positive dc-dc iso regulator - 5V @ 0,6A", Encapsulamento=TRN3, Valor="5V ; 0,6A"
U94 U96: "8-Terminal Positive dc-dc iso regulator - 5V @ 1,2A", Encapsulamento=RS6, Valor="5V ; 1,2A"
U101: "50 mA, 100 mA and 150 mA CMOS LDOs with Active-Low Shutdown and Reference Bypass, 5-Pin SOT-23, Extended Temperature, Tape and Reel", Manufacturer=Microchip, Supplier Part Number 1=TC1014-3.3VCT713TR-ND, Code_IPC=SOT23-5, ComponentLink1Description="Manufacturer URL", ComponentLink1URL=http://www.microchip.com/, ComponentLink2Description=Datasheet, ComponentLink2URL=http://ww1.microchip.com/downloads/en/DeviceDoc/21335e.pdf, ComponentLink3Description="Package Specification", ComponentLink3URL=http://www.microchip.com/stellent/groups/techpub_sg/documents/packagingspec/en012702.pdf, DatasheetVersion="revE, Feb-2007", Mounting Technology="Surface Mount", PackageDescription="5-Lead Plastic Small Outline Transistor (CT) [SOT-23]", PackageReference=SOT-23-CT5, PackageVersion="revBB, Aug-2009", PartNumber=TC1014-3.3VCT713, Supplier 1=Digi-Key, Supplier 2=Digi-Key, Supplier 3=Digi-Key, Supplier 4=Farnell, Supplier 5=Farnell, Supplier 6=Newark, Supplier 7=Mouser, Supplier Part Number 2=TC1014-3.3VCT713CT-ND, Supplier Part Number 3=TC1014-3.3VCT713DKR-ND, Supplier Part Number 4=1331502RL, Supplier Part Number 5=1331502, Supplier Part Number 6=61K3534, Supplier Part Number 7=579-TC1014-3.3VCT713
C1 C2 C3 C4 C9 C10 C11 C12 C17 C18 C19 C20 C29 C30 C31 C32 C33 C34 C35 C36 C41 C42 C43 C44 C49 C50 C51 C52 C61 C62 C63 C64 C65 C66 C67 C68 C73 C74 C75 C76 C81 C82 C83 C84 C93 C94 C95 C96 C97 C98 C99 C100 C105 C106 C107 C108 C113 C114 C115 C116 C125 C126 C127 C128: Valor=1u
C5 C6 C7 C8 C13 C14 C15 C16 C21 C22 C23 C24 C25 C26 C27 C28 C37 C38 C39 C40 C45 C46 C47 C48 C53 C54 C55 C56 C57 C58 C59 C60 C69 C70 C71 C72 C77 C78 C79 C80 C85 C86 C87 C88 C89 C90 C91 C92 C101 C102 C103 C104 C109 C110 C111 C112 C117 C118 C119 C120 C121 C122 C123 C124 C129 C130 C131 C132 C139 C140 C142 C155 C156: Valor=100n
C133 C134 C135 C136 C141 C143 C144 C145 C146 C149 C150 C151 C152 C157 C158 C161 C162: Valor=10u
C137 C138 C153 C154: Valor=1n
C159 C163: Valor=4.7u
C160: Valor=470p

## Free pads (board coordinates)
  round 0 hole 125 unplated: 0(1300,3000.04) 1(1300,199.96)

## Via types
v1: diameter 30, hole 15, Top Layer to Bottom Layer, tented both sides, 508 vias

## Nets (pads, with @x,y where several pads share a name; then routed paths per layer and width w, separated by ;. In a path a pad name is that pad's centre, name@x,y a point inside that pad or via, vN(x,y) a via of type N, cw(c..) or ccw(c..) an arc to the next point about the centre after c; other vN are vias at no path point)
+3V3_ISO: C131.1 C132.2 C163.2 U83.16 U84.8 U101.5 | length 4641.2
  Top Layer w15: U83.16@825.79,495 U83.16@835,495 ; v1(895,525) v1(865,525) U83.16@835,495 ; C131.1@900,490 895,495 U83.16@835,495 ; U101.5@1382.4,3697.76 1382.4,3637.24 C163.2@1380.16,3635 1390,3625.16 v1(1390,3610) v1(1390,3580) ; v1(1520,345) v1(1540,325) 1645,220 1789.92,220 C132.2@1790,220.08 1799.92,230 U84.8@1866.89,230
  Bottom Layer w15: v1(865,525) v1(895,525) 1125,525 1298,698 ; v1(1390,3610) v1(1390,3580) 1390,3110 1437,3063 1437,2962 1410,2935 1410,2911 1298,2799 1298,702 1520,480 v1(1520,345) v1(1540,325)
+3V3_RX: C81.2 C82.2 C83.2 C84.2 C113.2 C114.2 C115.2 C116.2 C146.2 R89.1 U49.20 U50.20 U51.20 U52.20 U69.20 U70.20 U71.20 U72.20 U92.4 | length 4461.9
  Top Layer w20: R89.1@340.08,3230 v1(380,3230) ; v1(360,3460) 345,3445 v1(340,3445) 339.93,3444.93 U92.4@339.93,3354.97 339.93,3270.07 v1(380,3230) ; v1(410,3230) v1(380,3230) ; v1(435,1005) v1@441.56,1005 ; v1(435,1325) v1@441.56,1325 ; v1(435,1645) v1@441.56,1645 ; v1(435,2285) v1@441.56,2285 ; v1(435,2925) v1@441.56,2925 ; U49.20@469.49,712.93 U49.20@462.93,712.93 ; U50.20@469.49,1032.93 U50.20@465,1028.44 ; U51.20@469.49,1352.93 U51.20@465,1348.44 ; U52.20@469.49,1672.93 U52.20@465,1668.44 ; U69.20@469.49,1992.5 U69.20@462.5,1992.5 ; U70.20@469.49,2312.93 U70.20@465,2308.44 ; U71.20@469.49,2632.93 U71.20@462.93,2632.93 ; U72.20@469.49,2952.93 U72.20@465,2948.44 ; v1@441.56,1005 U50.20@465,1028.44 ; v1@441.56,1005 v1(465,1005) U50.20@465,1028.44 ; v1@441.56,1325 U51.20@465,1348.44 ; v1@441.56,1325 v1(465,1325) U51.20@465,1348.44 ; v1@441.56,1645 U52.20@465,1668.44 ; v1@441.56,1645 v1(465,1645) U52.20@465,1668.44 ; v1@441.56,2285 U70.20@465,2308.44 ; v1@441.56,2285 v1(465,2285) U70.20@465,2308.44 ; v1@441.56,2925 U72.20@465,2948.44 ; v1@441.56,2925 v1(465,2925) U72.20@465,2948.44 ; U69.20@462.5,1992.5 v1(435,1965) v1(465,1965) 465,1990 U69.20@462.5,1992.5 ; U49.20@462.93,712.93 v1(435,685) v1(465,685) 465,710.87 U49.20@462.93,712.93 ; U71.20@462.93,2632.93 v1(435,2605) v1(465,2605) 465,2630.87 U71.20@462.93,2632.93
  Bottom Layer w20: v1(340,3445) 345,3445 v1(360,3460) 347.48,3472.52 C146.2@347.48,3495 ; v1(380,3230) v1(410,3230) 450,3190 450,2940 ; v1(435,685) 450,700 ; v1(435,1005) 450,1020 ; v1(435,1325) 450,1340 ; v1(435,1645) 450,1660 ; v1(435,2285) 450,2300 ; v1(435,2605) 450,2620 ; C81.2@500,694.92 490.08,685 v1(465,685) 450,700 ; C82.2@500,1014.92 490.08,1005 v1(465,1005) 450,1020 ; C83.2@500,1334.92 490.08,1325 v1(465,1325) 450,1340 ; C84.2@500,1655 490,1645 v1(465,1645) 450,1660 ; C113.2@500,1974.92 490.08,1965 v1(465,1965) ; C114.2@500,2294.92 490.08,2285 v1(465,2285) 450,2300 ; C115.2@500,2615 490,2605 v1(465,2605) 450,2620 ; C116.2@500,2934.92 490.08,2925 v1(465,2925) ; 450,700 450,1020 ; 450,1020 450,1340 ; 450,1340 450,1660 ; 450,1660 v1@450,1965 ; v1@450,1965 450,1980 ; v1@450,1965 v1(465,1965) ; v1@450,1965 v1(435,1965) 450,1980 ; 450,1980 v1(465,1965) ; 450,1980 450,2300 ; 450,2300 450,2620 ; 450,2620 v1@450,2925 ; v1@450,2925 450,2940 ; v1@450,2925 v1(465,2925) ; v1@450,2925 v1(435,2925) 450,2940 ; 450,2940 v1(465,2925)
+3V3_RX_ISO: C73.1 C74.1 C75.1 C76.1 C105.1 C106.1 C107.1 C108.1 C162.2 U49.1 U50.1 U51.1 U52.1 U69.1 U70.1 U71.1 U72.1 U100.4 | length 4663.9
  Top Layer w20: U72.1@780.51,2952.93 790,2943.44 v1(790,2925) v1(820,2925) 792.07,2952.93 U72.1@790,2950.87 ; v1(995,3265) 1008.07,3278.07 ; v1(1020,3265) 1008.07,3276.93 1008.07,3278.07 ; v1(1045,3460) 1035,3460 v1(1020,3445) 1008.07,3433.07 U100.4@1008.07,3354.97 1008.07,3278.07 ; 790,2303.44 790,2310.87 U70.1@792.07,2312.93 ; 790,2303.44 v1(790,2285) v1(820,2285) U70.1@792.07,2312.93 ; 790,2303.44 780.51,2312.93 U70.1@792.07,2312.93 ; U49.1@780.51,712.93 792.07,712.93 v1(820,685) v1(790,685) 790,703.44 U49.1@780.51,712.93 ; U50.1@780.51,1032.93 792.07,1032.93 v1(820,1005) v1(790,1005) 790,1023.44 U50.1@780.51,1032.93 ; U51.1@780.51,1352.93 792.07,1352.93 v1(820,1325) v1(790,1325) 790,1343.44 U51.1@780.51,1352.93 ; U52.1@780.51,1672.93 792.07,1672.93 v1(820,1645) v1(790,1645) 790,1663.44 U52.1@780.51,1672.93 ; U69.1@780.51,1992.5 792.5,1992.5 v1(820,1965) v1(790,1965) 790,1983.01 U69.1@780.51,1992.5 ; U71.1@780.51,2632.93 792.07,2632.93 v1(820,2605) v1(790,2605) 790,2623.44 U71.1@780.51,2632.93
  Bottom Layer w20: C73.1@750,695 760,685 v1(790,685) 805,700 ; C75.1@750,1334.92 759.92,1325 v1(790,1325) 805,1340 ; C76.1@750,1654.92 759.92,1645 v1(790,1645) 805,1660 ; C105.1@750,1974.92 759.92,1965 v1(790,1965) 805,1980 ; C106.1@750,2294.92 759.92,2285 v1(790,2285) 805,2300 ; C107.1@750,2615 760,2605 v1(790,2605) 805,2620 ; C108.1@750,2934.92 759.92,2925 v1(790,2925) ; C74.1@755,1015 765,1005 v1(790,1005) 805,1020 ; v1(820,685) 805,700 ; v1(820,1005) 805,1020 ; v1(820,1325) 805,1340 ; v1(820,1645) 805,1660 ; v1(820,1965) 805,1980 ; v1(820,2285) 805,2300 ; v1(820,2605) 805,2620 ; v1(1020,3265) v1(995,3265) 955,3225 845,3225 805,3185 805,2940 ; v1(1020,3445) 1035,3460 v1(1045,3460) 1045,3487.48 C162.2@1037.48,3495 ; v1(790,2925) 805,2940 ; v1(790,2925) v1@805,2925 ; 805,700 805,1020 ; 805,1020 805,1340 ; 805,1340 805,1660 ; 805,1660 805,1980 ; 805,1980 805,2300 ; 805,2300 805,2620 ; 805,2620 v1@805,2925 ; v1@805,2925 805,2940 ; v1@805,2925 v1(820,2925) 805,2940
+3V3_TX: C9.1 C10.1 C11.1 C12.1 C41.1 C42.1 C43.1 C44.1 C145.2 R78.1 U9.1 U10.1 U11.1 U12.1 U29.1 U30.1 U31.1 U32.1 U91.4 | length 4724.5
  Top Layer w20: U9.1@2140.51,732.93 2150,723.44 ; U10.1@2140.51,1052.93 2150,1043.44 ; U11.1@2140.51,1372.93 2150,1363.44 ; U12.1@2140.51,1692.93 2150,1683.44 ; U29.1@2140.51,2012.93 2150,2003.44 ; U30.1@2140.51,2332.93 2150,2323.44 ; U31.1@2140.51,2652.93 2150,2643.44 ; U32.1@2140.51,2973.09 2150,2963.6 ; v1(2180,705) v1@2168.44,705 ; v1(2180,1025) v1@2168.44,1025 ; v1(2180,1345) v1@2168.44,1345 ; v1(2180,1665) v1@2168.44,1665 ; v1(2180,1985) v1@2168.44,1985 ; v1(2180,2305) v1@2168.44,2305 ; v1(2180,2625) v1@2168.44,2625 ; v1(2180,2945) v1@2168.6,2945 ; v1(2350,3230) v1(2380,3230) ; R78.1@2420,3230 v1(2380,3230) ; v1(2435,3460) 2420,3445 v1(2415,3445) 2399.93,3429.93 U91.4@2399.93,3354.97 2399.93,3249.93 v1(2380,3230) ; 2150,723.44 v1@2168.44,705 ; 2150,723.44 v1(2150,705) v1@2168.44,705 ; 2150,1043.44 v1@2168.44,1025 ; 2150,1043.44 v1(2150,1025) v1@2168.44,1025 ; 2150,1363.44 v1@2168.44,1345 ; 2150,1363.44 v1(2150,1345) v1@2168.44,1345 ; 2150,1683.44 v1@2168.44,1665 ; 2150,1683.44 v1(2150,1665) v1@2168.44,1665 ; 2150,2003.44 v1@2168.44,1985 ; 2150,2003.44 v1(2150,1985) v1@2168.44,1985 ; 2150,2323.44 v1@2168.44,2305 ; 2150,2323.44 v1(2150,2305) v1@2168.44,2305 ; 2150,2643.44 v1@2168.44,2625 ; 2150,2643.44 v1(2150,2625) v1@2168.44,2625 ; 2150,2963.6 v1@2168.6,2945 ; 2150,2963.6 v1(2150,2945) v1@2168.6,2945
  Bottom Layer w20: C12.1@2110,1674.84 2119.84,1665 v1(2150,1665) ; C41.1@2110,1994.92 2119.92,1985 v1(2150,1985) ; C42.1@2110,2314.92 2119.92,2305 v1(2150,2305) ; C43.1@2110,2634.92 2119.92,2625 v1(2150,2625) ; C44.1@2110,2954.92 2119.92,2945 v1(2150,2945) ; C9.1@2115,714.92 2124.92,705 v1(2150,705) ; C10.1@2115,1034.84 2124.84,1025 v1(2150,1025) ; C11.1@2115,1354.84 2124.84,1345 v1(2150,1345) ; v1@2180,2310 v1(2180,2305) ; v1(2380,3230) v1(2350,3230) 2190,3230 2165,3205 2165,2960 ; v1(2415,3445) 2430,3460 v1(2435,3460) 2432.48,3462.52 C145.2@2432.48,3495 ; v1(2150,705) 2165,720 ; v1(2150,705) v1(2180,705) 2165,720 ; v1(2150,1025) 2165,1040 ; v1(2150,1025) v1@2165,1025 ; v1(2150,1345) 2165,1360 ; v1(2150,1345) v1@2165,1345 ; v1(2150,1665) 2165,1680 ; v1(2150,1665) v1@2165,1665 ; v1(2150,1985) 2165,2000 ; v1(2150,1985) v1@2165,1985 ; v1(2150,2305) 2165,2320 ; v1(2150,2305) v1@2165,2305 ; v1(2150,2625) 2165,2640 ; v1(2150,2625) v1@2165,2625 ; v1(2150,2945) 2165,2960 ; v1(2150,2945) v1@2165,2945 ; 2165,720 v1@2165,1025 ; v1@2165,1025 2165,1040 ; v1@2165,1025 v1(2180,1025) 2165,1040 ; 2165,1040 v1@2165,1345 ; v1@2165,1345 2165,1360 ; v1@2165,1345 v1(2180,1345) 2165,1360 ; 2165,1360 v1@2165,1665 ; v1@2165,1665 2165,1680 ; v1@2165,1665 v1(2180,1665) 2165,1680 ; 2165,1680 v1@2165,1985 ; v1@2165,1985 2165,2000 ; v1@2165,1985 v1(2180,1985) 2165,2000 ; 2165,2000 v1@2165,2305 ; v1@2165,2305 2165,2320 ; v1@2165,2305 v1(2180,2305) ; 2165,2320 v1@2165,2625 ; 2165,2320 v1(2180,2305) ; v1@2165,2625 2165,2640 ; v1@2165,2625 v1(2180,2625) 2165,2640 ; 2165,2640 v1@2165,2945 ; v1@2165,2945 2165,2960 ; v1@2165,2945 v1(2180,2945) 2165,2960
+3V3_TX_ISO: C17.2 C18.2 C19.2 C20.2 C49.2 C50.2 C51.2 C52.2 C161.2 U9.20 U10.20 U11.20 U12.20 U29.20 U30.20 U31.20 U32.20 U99.4 | length 4595.5
  Top Layer w20: v1(1775,3460) 1760,3445 v1(1750,3445) 1736.93,3431.93 U99.4@1736.93,3354.97 1736.93,3278.07 ; v1(1795,705) v1@1801.56,705 ; v1(1795,1025) v1@1801.56,1025 ; v1(1795,1345) v1@1801.56,1345 ; v1(1795,1665) v1@1801.56,1665 ; v1(1795,1985) v1@1801.56,1985 ; v1(1795,2305) v1@1801.56,2305 ; v1(1795,2625) v1@1801.56,2625 ; v1(1795,2945) v1@1801.4,2945 ; U9.20@1829.49,732.93 U9.20@1825,728.44 ; U10.20@1829.49,1052.93 U10.20@1825,1048.44 ; U11.20@1829.49,1372.93 U11.20@1825,1368.44 ; U12.20@1829.49,1692.93 U12.20@1825,1688.44 ; U29.20@1829.49,2012.93 U29.20@1825,2008.44 ; U30.20@1829.49,2332.93 U30.20@1825,2328.44 ; U31.20@1829.49,2652.93 U31.20@1825,2648.44 ; U32.20@1829.49,2973.09 U32.20@1825,2968.6 ; 1736.93,3278.07 v1(1750,3265) v1(1725,3265) 1736.93,3276.93 1736.93,3278.07 ; v1@1801.4,2945 U32.20@1825,2968.6 ; v1@1801.4,2945 v1(1825,2945) U32.20@1825,2968.6 ; v1@1801.56,705 U9.20@1825,728.44 ; v1@1801.56,705 v1(1825,705) U9.20@1825,728.44 ; v1@1801.56,1025 U10.20@1825,1048.44 ; v1@1801.56,1025 v1(1825,1025) U10.20@1825,1048.44 ; v1@1801.56,1345 U11.20@1825,1368.44 ; v1@1801.56,1345 v1(1825,1345) U11.20@1825,1368.44 ; v1@1801.56,1665 U12.20@1825,1688.44 ; v1@1801.56,1665 v1(1825,1665) U12.20@1825,1688.44 ; v1@1801.56,1985 U29.20@1825,2008.44 ; v1@1801.56,1985 v1(1825,1985) U29.20@1825,2008.44 ; v1@1801.56,2305 U30.20@1825,2328.44 ; v1@1801.56,2305 v1(1825,2305) U30.20@1825,2328.44 ; v1@1801.56,2625 U31.20@1825,2648.44 ; v1@1801.56,2625 v1(1825,2625) U31.20@1825,2648.44
  Bottom Layer w20: v1(1725,3265) v1(1750,3265) 1810,3205 1810,2960 ; v1(1750,3445) 1760,3445 v1(1775,3460) 1767.48,3467.52 C161.2@1767.48,3495 ; v1@1795,1350 v1(1795,1345) ; v1@1795,1990 v1(1795,1985) ; v1@1795,2950 v1(1795,2945) ; v1@1825,1350 v1(1825,1345) ; v1@1825,1990 v1(1825,1985) ; v1@1825,2950 v1(1825,2945) ; C17.2@1860,715 1850,705 v1(1825,705) ; C18.2@1860,1034.92 1850.08,1025 v1(1825,1025) ; C19.2@1860,1354.92 1850.08,1345 v1(1825,1345) ; C20.2@1860,1674.84 1850.16,1665 v1(1825,1665) ; C49.2@1860,1994.92 1850.08,1985 v1(1825,1985) ; C50.2@1860,2314.92 1850.08,2305 v1(1825,2305) ; C51.2@1860,2634.92 1850.08,2625 v1(1825,2625) ; C52.2@1860,2954.92 1850.08,2945 v1(1825,2945) ; v1(1795,1345) 1810,1360 ; v1(1795,1345) v1@1810,1345 ; v1(1795,1985) 1810,2000 ; v1(1795,1985) v1@1810,1985 ; v1(1795,2945) 1810,2960 ; v1(1795,2945) v1@1810,2945 ; 1810,720 v1(1825,705) ; 1810,720 v1@1810,1025 ; 1810,720 v1(1795,705) v1(1825,705) ; v1@1810,1025 1810,1040 ; v1@1810,1025 v1(1795,1025) 1810,1040 ; v1@1810,1025 v1(1825,1025) ; 1810,1040 v1@1810,1345 ; 1810,1040 v1(1825,1025) ; v1@1810,1345 1810,1360 ; v1@1810,1345 v1(1825,1345) ; 1810,1360 v1@1810,1665 ; 1810,1360 v1(1825,1345) ; v1@1810,1665 1810,1680 ; v1@1810,1665 v1(1795,1665) 1810,1680 ; v1@1810,1665 v1(1825,1665) ; 1810,1680 v1(1825,1665) ; 1810,1680 v1@1810,1985 ; v1@1810,1985 1810,2000 ; v1@1810,1985 v1(1825,1985) ; 1810,2000 v1@1810,2305 ; 1810,2000 v1(1825,1985) ; v1@1810,2305 1810,2320 ; v1@1810,2305 v1(1795,2305) 1810,2320 ; v1@1810,2305 v1(1825,2305) ; 1810,2320 v1@1810,2625 ; 1810,2320 v1(1825,2305) ; v1@1810,2625 1810,2640 ; v1@1810,2625 v1(1795,2625) 1810,2640 ; v1@1810,2625 v1(1825,2625) ; 1810,2640 v1(1825,2625) ; 1810,2640 v1@1810,2945 ; v1@1810,2945 1810,2960 ; v1@1810,2945 v1(1825,2945) ; 1810,2960 v1(1825,2945)
+3V3a: C130.1 R78.2 U84.1 U84.3 | length 3520.7
  Top Layer w15: U84.3@2103.11,330 2055,330 2045,320 2045,245 2060,230 U84.1@2103.11,230 2165,230 ; v1(2230,230) v1(2200,230) 2184.92,230 ; v1(2460,3175) v1(2460,3205) 2460.16,3205.16 R78.2@2460.16,3230 ; 2165,230 2184.92,230 ; 2165,230 2174.92,220.08 C130.1@2175,220.08 2184.92,230
  Bottom Layer w15: v1(2200,230) v1(2230,230) 2245,230 2340,325 2340,2990 2460,3110 v1(2460,3175) v1(2460,3205)
+3V3b: C129.2 R89.2 U83.1 U83.7 | length 3404
  Top Layer w10: U83.7@424.21,195 475,195 520,240 520,460 485,495 U83.1@424.21,495
  Top Layer w15: v1(265,3185) 280,3200 v1(280,3210) 280,3210.08 R89.2@299.92,3230 ; v1(295,495) v1(325,495) C129.2@354.92,495 ; C129.2@350,490.08 C129.2@354.92,495 ; U83.1@424.21,495 C129.2@354.92,495
  Bottom Layer w15: v1(280,3210) 265,3195 v1(265,3185) 265,525 v1(295,495) v1(325,495)
+12V: C133.2 C134.2 C141.2 C142.2 C149.2 C150.2 D1.1 U87.1 U88.1 U93.2 U94.2 U95.2 U96.2 | length 3720.5
  Top Layer w20: U88.1@360,5008 582,5008 675,4915 ; U95.2@591.02,4400 591.02,4423.98 495,4520 U96.2@485,4520 485,4720 677.5,4912.5 675,4915 ; U94.2@2125,4380 2115,4380 2020.24,4474.76 U93.2@2020.24,4500 2020.24,4739.24 2103,4822 ; U87.1@2245,4822 2103,4822 ; 675,4915 985,4915 1027.12,4957.12 D1.1@1027.12,5020 1032.2,5025.08 C142.2@1160,5025.08 1174.92,5040 C141.2@1222.52,5040 1222.52,5072.52 1230,5080 1845,5080 2103,4822
  Bottom Layer w20: U88.1@360,5008 360,4912.48 C134.2@362.48,4910 ; C150.2@580,4305 591.02,4316.02 U95.2@591.02,4400 ; U93.2@2020.24,4500 2032.52,4512.28 C149.2@2032.52,4590 ; C133.2@2237.52,4920 2237.52,4829.48 U87.1@2245,4822